# Altium PCB PCB1.PCBDOC
Units mm, origin at the board's own origin, x right, y up, seen from the top; angles counter-clockwise.
Board outline 152.4 x 101.6 mm, 2 copper layers (Top Layer, Bottom Layer); 16 components, 32 nets, 107 pads, 0 vias.
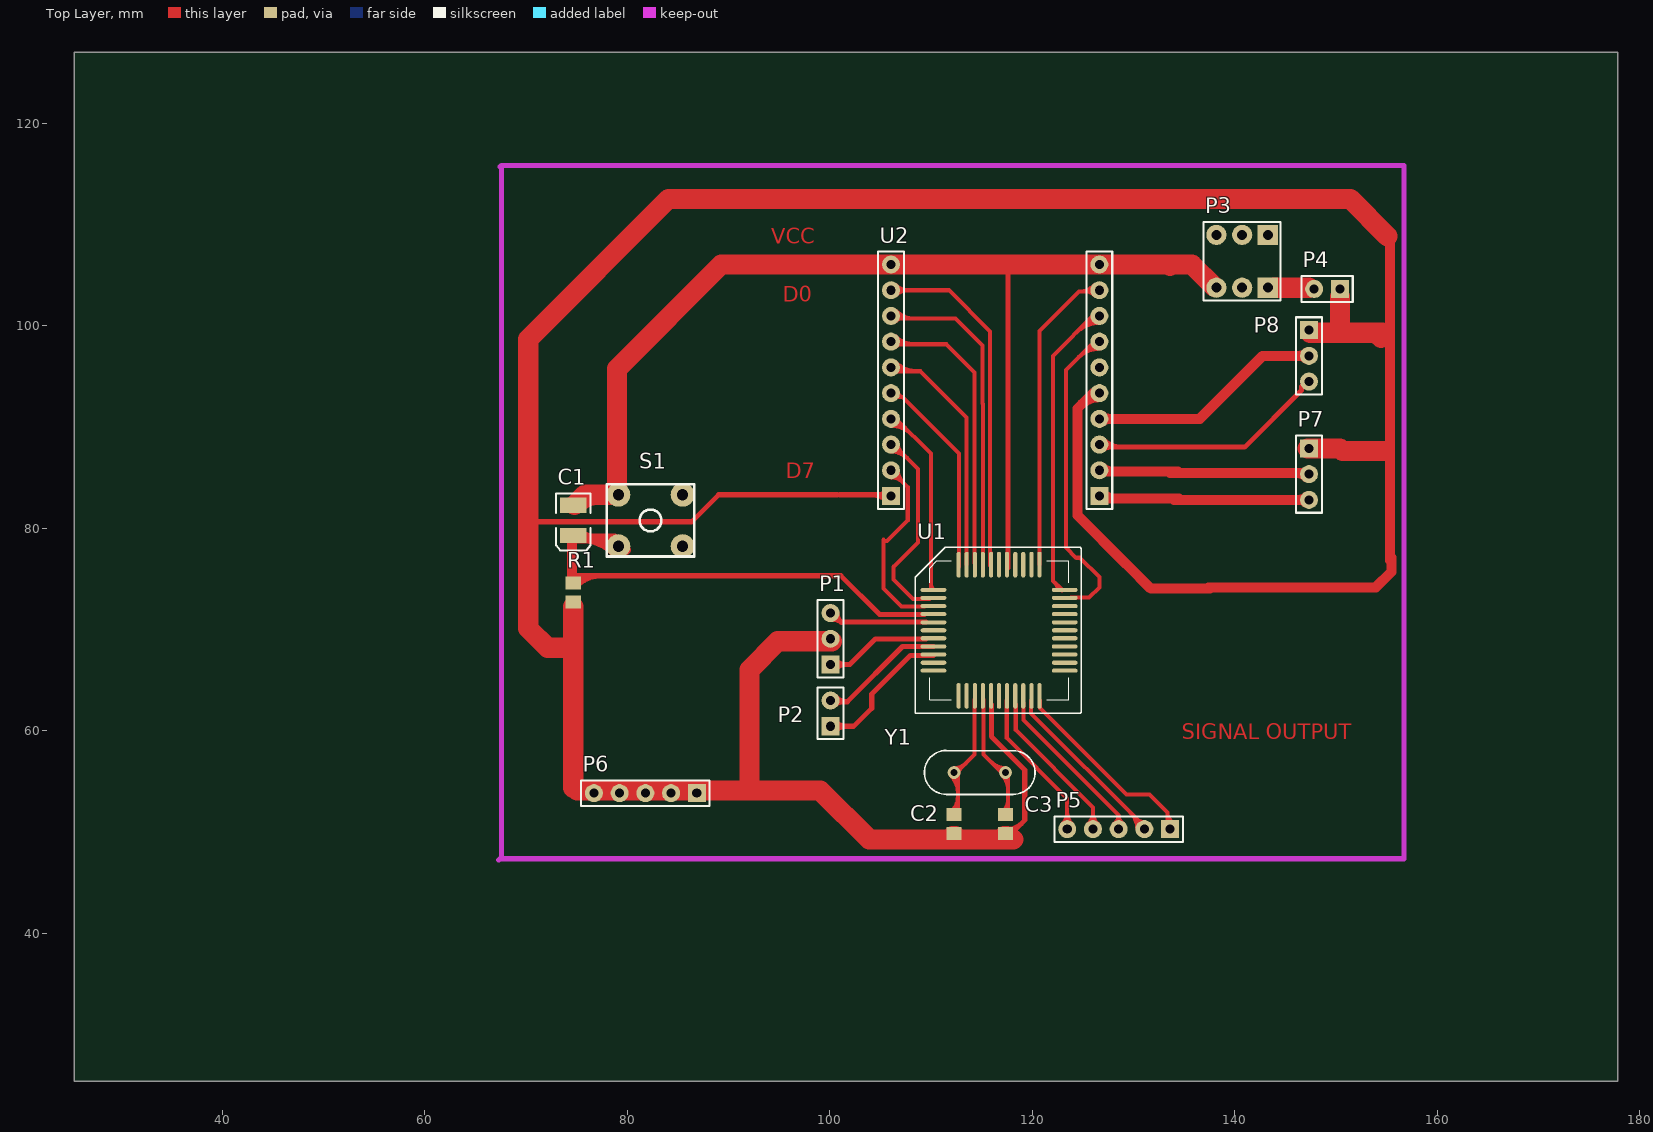
[diagram p0: Top Layer view]
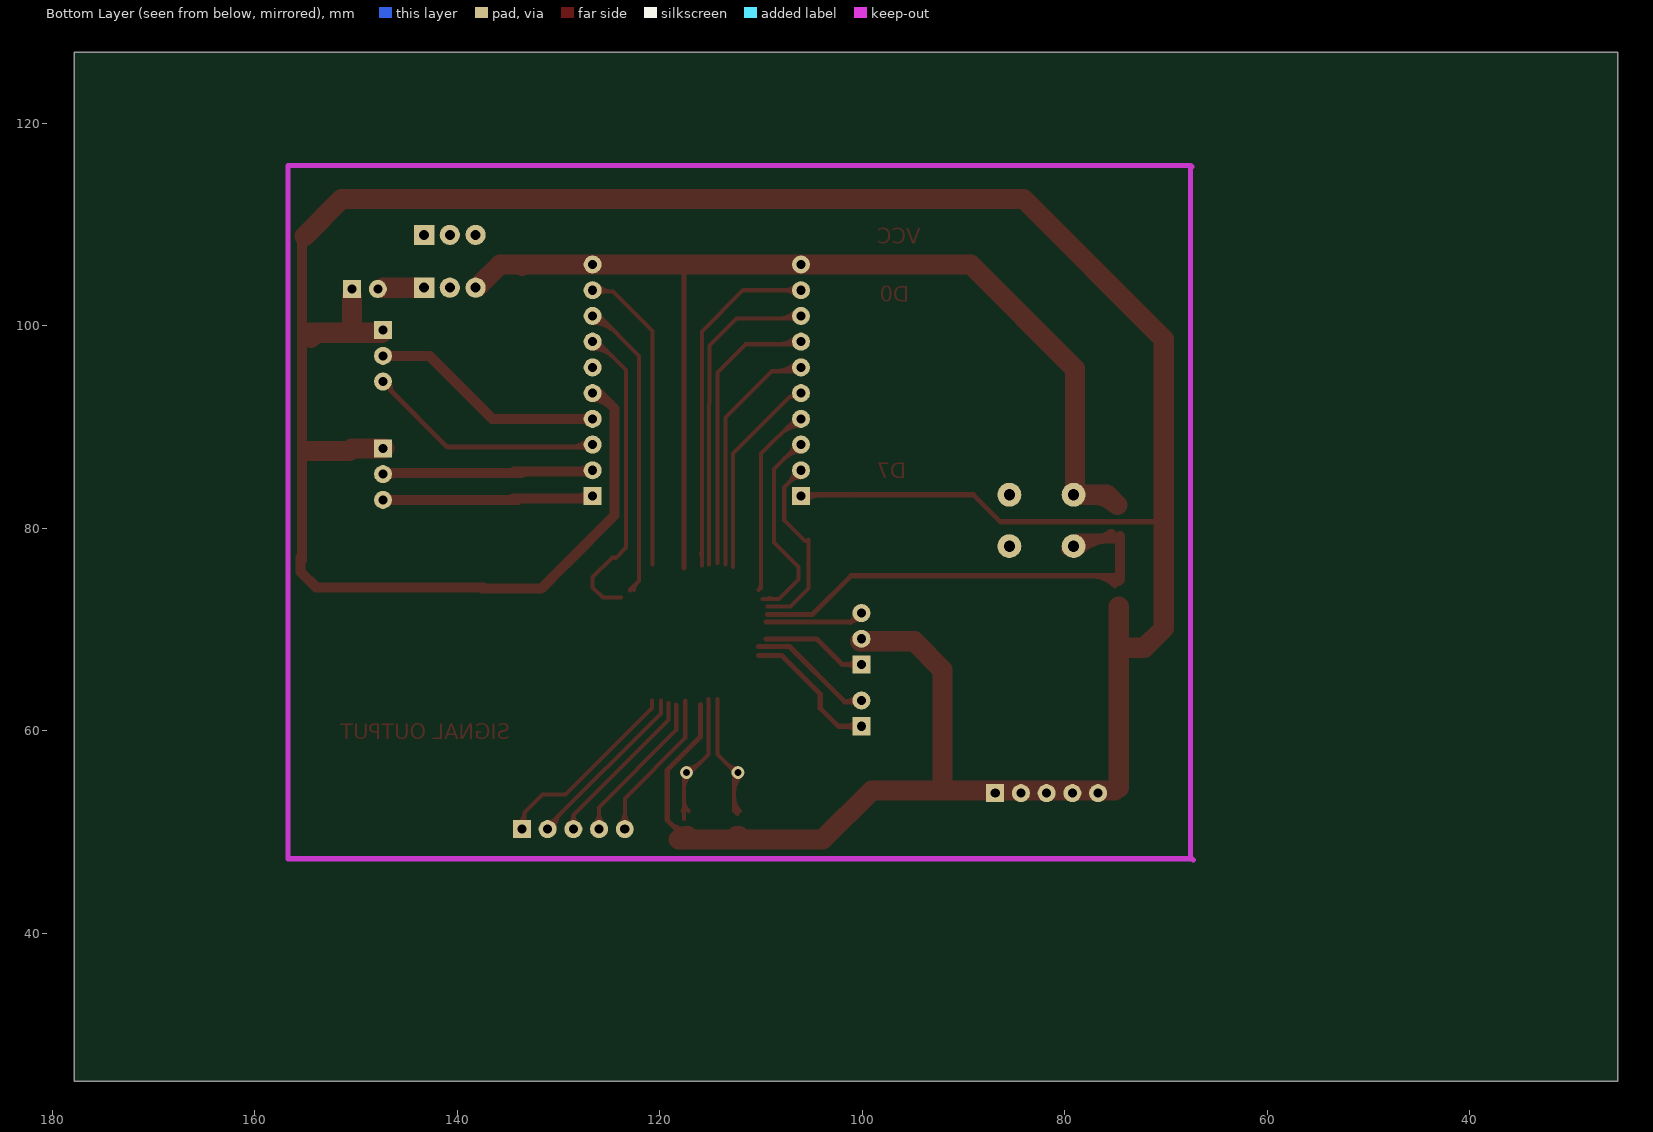
[diagram p1: Bottom Layer view, seen from below]

## Layer stack, top to bottom
Top Layer: signal copper 0.0356
Dielectric: dielectric 0.32, FR-4, Dk 4.8
Bottom Layer: signal copper 0.0356

## Board outline
25.4,25.4 177.8,25.4 177.8,127 25.4,127

## Design rules (kind name [scope] priority, off if disabled: settings)
Clearance [All] p1: gap=0.2
ComponentClearance [All] p1: gap=0.254 collisioncheckmode=3 verticalgap=0.254
PolygonConnect [All] p1: connectstyle=Relief reliefconductorwidth=0.254 reliefentries=4 polygonreliefangle="90 Angle"
RoutingVias [All] p1: holewidth=0.711 width=1.27 viastyle="Through Hole" minholewidth=0.711 minwidth=1.27 maxholewidth=0.711 maxwidth=1.27
SolderMaskExpansion [All] p1: expansion=0.102
TestPointUsage [All] p1: valid=0 allowmultiple=FALSE
Testpoint [All] p1: side=15 testpointundercomponent=TRUE minsize=1.016 maxsize=2.54 preferedsize=1.524 minholesize=0 maxholesize=1.016 preferedholesize=0.813 testpointgrid=0.025 style=1023 order=0123456789
Width [All] p1: maxlimit=3 minlimit=0.254 preferedwidth=0.254 minimp=50.000000 maximp=50.000000 favimp=50.000000
18 further rules are at their usual default settings.

## Components (designator, comment, footprint, x,y, rotation, side; value= is the part's Value field where it differs from the comment)
C1 "Cap Pol1" 3.5X2.8X1.9 74.676,80.772 r270 top
C2 "Cap" 2012[0805] 112.268,50.8 r90 top
C3 "Cap" 6-0805 117.348,50.8 r90 top
P1 "Header 3" HDR1X3 100.076,66.548 r90 top
P2 "Header 2" HDR1X2 100.076,60.452 r90 top
P3 "Header 3X2" KZ 143.764,108.204 r180 top
P4 "Header 2" HDR1X2 150.368,103.632 r180 top
P5 "Header 5" HDR1X5 133.604,50.292 r180 top
P6 "Header 5" HDR1X5 86.868,53.848 r180 top
P7 "Header 3" HDR1X3 147.32,87.884 r270 top
P8 "Header 3" HDR1X3 147.32,99.568 r270 top
R1 "Res2" 6-0805 74.676,73.66 r90 top
S1 "SW-PB" 按键 82.296,80.772 r90 top
U1 "STC11F02" LQLPF44 109.728,62.992 r0 top
U2 "AD9850" ADMK 104.648,81.788 r0 top
Y1 "XTAL" XTAL-200mil 112.268,55.88 r0 top

## Footprints (in the part's own frame and the unit in brackets; to place one, negate y for a bottom-side part, rotate by r counter-clockwise, add the part's x,y. Pads: shape width x height; smd on the part's side, far side on the other; paste and mask are expansions set on the pad)
3.5X2.8X1.9 [mm] "SM LED; 2 C-Bend Leads; Body 3.5 x 2.8 x 1.9 mm, inc leads (LxWxH typ)"
  rect 1.5x2.6 smd: 1(-1.5,0) 2(1.5,0)
  silkscreen extent -2.65,-1.7 2.95,1.7
6-0805 [mm] "Chip Resistor; Body 2.0 x 1.3 mm (LxW typ)"
  rect 1.3x1.5 smd: 1(-0.95,0) 2(0.95,0)
2012[0805] [mm] "Chip Resistor; Body 2.0 x 1.3 mm (LxW typ)"
  rect 1.3x1.5 smd: 1(-0.95,0) 2(0.95,0)
ADMK [mil]
  rect 70.06x70.06 hole 35.43: 1(55,55) 20(865,55)
  round 70.06 hole 35.43: 2(55,155) 3(55,255) 4(55,355) 5(55,455) 6(55,555) 7(55,655) 8(55,755) 9(55,855) 10(55,955) 11(865,955) 12(865,855) 13(865,755) 14(865,655) 15(865,555) 16(865,455) 17(865,355) 18(865,255) 19(865,155)
  Top Layer lines w10: 45,55 55,55 ; 55,45 55,55 ; 55,65 55,55 ; 65,55 60,55 55,55 ; 855,40 865,40 ; 865,30 865,40 ; 865,50 865,40 ; 895,40 865,40
  silkscreen extent 5,5 915,1005
HDR1X2 [mm] "Connector; Header; 2 Position"
  rect 1.779x1.779 hole 0.9: 1(0,0)
  round 1.779 hole 0.9: 2(2.54,0)
  silkscreen extent -1.27,-1.27 3.81,1.27
HDR1X3 [mm] "Connector; Header; 3 Position"
  rect 1.779x1.779 hole 0.9: 1(0,0)
  round 1.779 hole 0.9: 2(2.54,0) 3(5.08,0)
  silkscreen extent -1.27,-1.27 6.35,1.27
HDR1X5 [mm] "Connector; Header; 5 Position"
  rect 1.779x1.779 hole 0.9: 1(0,0)
  round 1.779 hole 0.9: 2(2.54,0) 3(5.08,0) 4(7.62,0) 5(10.16,0)
  silkscreen extent -1.27,-1.27 11.43,1.27
KZ [mm]
  rect 2x2 hole 1: 1(0.508,4.445) 4(0.508,-0.762)
  round 2 hole 1: 2(3.048,4.445) 3(5.588,4.445) 5(3.048,-0.762) 6(5.588,-0.762)
  silkscreen extent -0.76,-2.03 6.86,5.72
LQLPF44 [mil] "STC"
  oval 100x16 smd: 1(20,430) 2(20,399) 3(20,367) 4(20,336) 5(20,304) 6(20,273) 7(20,242) 8(20,210) 9(20,179) 10(20,147) 11(20,116) 23(530,116) 24(530,147) 25(530,179) 26(530,210) 27(530,242) 28(530,273) 29(530,304) 30(530,336) 31(530,367) 32(530,399) 33(530,430)
  oval 16x100 smd: 12(118,18) 13(149,18) 14(181,18) 15(212,18) 16(244,18) 17(275,18) 18(306,18) 19(338,18) 20(369,18) 21(401,18) 22(432,18) 34(432,528) 35(401,528) 36(369,528) 37(338,528) 38(306,528) 39(275,528) 40(244,528) 41(212,528) 42(181,528) 43(149,528) 44(118,528)
  silkscreen extent -50,-50 595,595
XTAL-200mil [mil]
  round 50 hole 28: 1(0,0) 2(200,0)
  silkscreen extent -115,-85 315,86
按键 [mm]
  round 2.358 hole 1.1: 1(-2.54,3.175) 1(-2.54,-3.175) 2(2.54,3.175) 2(2.54,-3.175)
  silkscreen extent -3.56,-4.32 3.56,4.32

## Part data
C1: "Polarized Capacitor (Radial)"
C2 C3: "Capacitor"
P1 P7 P8: "Header, 3-Pin"
P2 P4: "Header, 2-Pin"
P3: "Header, 3-Pin, Dual row"
P5 P6: "Header, 5-Pin"
R1: "Resistor"
S1: "Switch"
Y1: "Crystal Oscillator"

## Nets (pads, with @x,y where several pads share a name; then routed paths per layer and width w, separated by ;. In a path a pad name is that pad's centre, name@x,y a point inside that pad or via, vN(x,y) a via of type N, cw(c..) or ccw(c..) an arc to the next point about the centre after c; other vN are vias at no path point)
CLKOUT0: U1.10
CLKOUT1: U1.34 U2.12 | length 33.4
  Top Layer w0.4: U1.34 120.701,99.492 124.587,103.378 U2.12@125.857,103.378 ; 124.647,103.378 ccw(c124.647,105.477) U2.12@126.131,103.993 ; 125.261,103.378 cw(c125.261,102.147) U2.12@126.131,103.017 ; 125.613,103.378 ccw(c125.613,104.511) U2.12@126.414,103.71
DATA: U1.33 U2.13 | length 35.2
  Top Layer w0.4: 122.256,74.594 cw(c121.615,73.953) U1.33@122.519,73.884 ; U1.33@122.809,74.041 122.047,74.803 122.047,97.028 U2.13@126.111,101.092 ; U1.33@122.871,73.979 cw(c122.758,73.865) U1.33@122.918,73.853 ; 124.358,99.339 cw(c126.619,97.077) U2.13@126.619,100.275 ; 125.04,100.021 cw(c126.619,98.443) U2.13@126.619,100.675 ; 125.723,100.704 cw(c126.619,99.809) U2.13@126.619,101.075
FU_UD: U1.32 U2.14 | length 33.5
  Top Layer w0.4: U1.32@123.825,73.152 125.603,73.152 126.619,74.168 126.619,75.184 124.714,77.089 124.333,77.089 123.317,78.105 123.317,95.631 125.73,98.044 ; 124.574,96.888 cw(c126.619,94.844) U2.14@126.619,97.735 ; 125.257,97.571 cw(c126.619,96.209) U2.14@126.619,98.135
GND: C2.1 C3.1 P1.2 P4.1 P6.1 P6.2 P6.3 P6.4 P6.5 P7.1 P8.1 R1.1 U1.16 U2.1 U2.16 | length 369.7
  Top Layer w0.5: 70.612,81.026 70.993,80.645 86.36,80.645 89.027,83.312 100.711,83.312 ; 100.965,83.312 105.283,83.312 U2.1@105.41,83.185 ; 104.194,83.312 cw(c104.194,81.334) U2.1@105.593,82.733 ; 104.807,83.312 ccw(c104.807,84.423) U2.1@105.593,83.637 ; U1.16@115.951,62.611 115.951,59.436 119.253,56.134 119.253,51.181 117.475,49.403 C3.1@117.348,49.403 ; C3.1@117.448,49.75 ccw(c117.448,50.653) C3.1@118.086,50.014 ; C3.1@117.448,50.25 ccw(c117.448,52.36) 118.94,50.868
  Top Layer w1: 124.87,92.231 cw(c126.619,90.481) U2.16@126.619,92.955 ; U2.16@125.984,93.345 124.46,91.821 124.46,81.28 129.286,76.454 ; 129.413,76.327 131.699,74.041 137.541,74.041 ; 137.414,74.168 153.924,74.168 155.448,75.692 155.448,77.089 ; 155.321,76.835 155.321,108.712 155.448,108.839
  Top Layer w2: 74.295,68.199 72.136,68.199 70.231,70.104 70.231,98.679 84.074,112.522 151.384,112.522 155.067,108.839 ; 74.676,54.356 R1.1@74.676,72.263 ; 75.057,54.102 99.06,54.102 103.886,49.276 118.11,49.276 ; 92.075,54.737 92.075,66.04 94.869,68.834 P1.2@100.203,68.834 ; C2.1@111.627,49.276 ccw(c111.627,50.391) C2.1@112.415,49.603 ; C2.1@112.121,49.603 ccw(c112.909,50.391) C2.1@112.909,49.276 ; C3.1@116.707,49.276 ccw(c116.707,50.391) C3.1@117.495,49.603 ; C3.1@117.201,49.603 ccw(c117.989,50.391) C3.1@117.989,49.276 ; P7.1@147.193,87.884 150.368,87.884 ; P8.1@147.447,99.314 154.559,99.314 ; 150.114,99.441 150.368,99.695 P4.1@150.368,102.87 ; 150.622,87.63 154.813,87.63 ; 154.178,99.06 154.432,98.806
INT0: P2.2 U1.8 | length 14.5
  Top Layer w0.5: P2.2@100.203,62.865 101.727,62.865 ; P2.2@100.528,62.54 cw(c101.314,61.754) 101.314,62.865 ; P2.2@100.565,63.405 ccw(c101.727,64.386) 101.727,62.865 ; U1.8 107.188,68.326 101.727,62.865
INT1: P2.1 U1.9 | length 15.4
  Top Layer w0.5: P2.1@100.528,60 cw(c101.62,58.908) 101.62,60.452 cw(c101.62,61.996) P2.1@100.528,60.904 ; P2.1@100.965,60.452 102.362,60.452 104.14,62.23 104.14,63.627 107.95,67.437 U1.9@110.236,67.437
NetC2_2: C2.2 U1.14 Y1.1 | length 19.2
  Top Layer w0.4: Y1.1@111.96,55.572 cw(c110.298,53.91) 112.649,53.91 ; C2.2@112.05,52.068 ccw(c110.603,53.515) 112.649,53.515 ; Y1.1@112.243,55.855 cw(c111.264,54.876) 112.649,54.876 ; Y1.1@112.268,55.626 114.3,57.658 U1.14@114.3,63.119 ; Y1.1@112.268,56.315 ccw(c112.268,57.978) 113.444,56.802 ; C2.2@112.333,51.785 ccw(c111.569,52.549) 112.649,52.549 ; C2.2@112.649,52.07 Y1.1@112.649,55.88 ; Y1.1@112.703,55.88 cw(c113.14,55.88) 112.831,56.189
NetC3_2: C3.2 U1.15 Y1.2 | length 19.3
  Top Layer w0.4: U1.15@115.111,62.38 cw(c114.921,62.191) 115.189,62.191 ; U1.15@115.189,63.119 115.189,57.658 Y1.2@117.221,55.626 ; 115.955,56.892 ccw(c117.348,58.285) Y1.2@117.348,56.315 ; 116.638,56.209 ccw(c117.348,56.919) Y1.2@117.348,55.915 ; Y1.2@117.04,55.572 cw(c115.685,54.217) 117.602,54.217 ; C3.2@117.13,52.068 ccw(c115.99,53.208) 117.602,53.208 ; Y1.2@117.323,55.855 cw(c116.65,55.182) 117.602,55.182 ; C3.2@117.602,51.308 Y1.2@117.602,55.753 ; 117.602,52.465 ccw(c118.163,52.465) C3.2@117.766,52.068
P1.0: U1.40 U2.9 | length 37.3
  Top Layer w0.4: U2.9@106.172,103.505 111.76,103.505 115.824,99.441 U1.40@115.824,76.327 ; U2.9@106.533,103.017 cw(c107.71,101.84) 107.71,103.505 cw(c107.71,105.17) U2.9@106.533,103.993 ; 115.824,77.723 ccw(c116.179,77.723) U1.40@115.928,77.472
P1.1: U1.41 U2.8 | length 35.3
  Top Layer w0.4: U2.8@106.25,101.17 ccw(c107.358,102.278) 107.358,100.711 ; U2.8@106.299,100.711 112.395,100.711 115.062,98.044 115.062,92.329 ; U2.8@106.533,100.477 cw(c107.097,99.913) 107.097,100.711 ; U2.8@106.533,101.453 ccw(c108.323,103.243) 108.323,100.711 ; U1.41 115.113,92.278
P1.2: U1.42 U2.7 | length 31.3
  Top Layer w0.4: U2.7@106.25,98.63 ccw(c107.358,99.738) 107.358,98.171 ; U2.7@106.533,97.937 cw(c107.097,97.373) 107.097,98.171 ; U2.7@106.533,98.913 ccw(c108.323,100.703) 108.323,98.171 ; U2.7@106.68,98.171 111.506,98.171 114.3,95.377 114.3,90.805 ; U1.42@114.3,76.581 114.3,90.678
P1.3: U1.43 U2.6 | length 27.3
  Top Layer w0.4: U2.6@106.25,96.09 ccw(c107.664,97.504) 107.664,95.504 ; U2.6@106.533,96.373 ccw(c108.63,98.47) 108.63,95.504 ; U2.6@106.553,95.504 108.966,95.504 113.513,90.957 U1.43
P1.4: U1.44 U2.5 | length 20.1
  Top Layer w0.4: U2.5@106.733,93.39 ccw(c107.188,93.42) 107.188,92.964 ; U2.5@106.807,92.964 107.188,92.964 ; U1.44@112.776,76.2 112.776,87.376 107.188,92.964
P1.5: U1.1 U2.4 | length 22.7
  Top Layer w0.4: U2.4@106.045,90.115 cw(c106.045,87.224) 108.09,89.268 ; U2.4@106.045,90.515 cw(c106.045,88.589) 107.407,89.951 ; U2.4@106.553,90.805 109.982,87.376 U1.1@109.982,74.041 ; 109.982,74.535 ccw(c110.857,74.535) U1.1@110.238,73.916
P1.6: U1.2 U2.3 | length 22.9
  Top Layer w0.4: U2.3@106.045,87.575 cw(c106.045,85.297) 107.656,86.908 ; U2.3@106.045,87.975 cw(c106.045,86.663) 106.973,87.591 ; 106.299,74.93 108.204,73.025 U1.2@109.855,73.025 ; 106.299,75.057 106.299,76.2 108.712,78.613 108.712,85.852 U2.3@106.68,87.884 ; U2.3@106.735,88.265 ccw(c107.787,88.265) 107.043,87.521 ; 108.916,73.025 ccw(c108.916,73.38) U1.2@109.167,73.129
P1.7: U1.3 U2.2 | length 20.6
  Top Layer w0.4: 105.283,78.74 105.664,78.74 107.696,80.772 107.696,84.074 U2.2@106.426,85.344 ; 105.283,78.867 105.283,74.041 107.061,72.263 U1.3@109.347,72.263 ; U2.2@106.045,85.035 cw(c106.045,83.37) 107.222,84.548 cw(c108.4,85.725) U2.2@106.735,85.725
P2.0: P5.5 U1.18 | length 17.9
  Top Layer w0.4: U1.18@117.475,62.992 117.475,59.309 123.444,53.34 P5.5@123.444,50.165 ; P5.5@122.956,50.78 ccw(c121.779,51.957) 123.444,51.957 ccw(c125.109,51.957) P5.5@123.932,50.78
P2.1: P5.4 U1.19 | length 17.7
  Top Layer w0.4: U1.19@118.364,62.611 118.364,60.071 125.984,52.451 P5.4@125.984,50.673 ; P5.4@125.496,50.78 ccw(c124.319,51.957) 125.984,51.957 ccw(c127.649,51.957) P5.4@126.472,50.78
P2.2: P5.3 U1.20 | length 18.2
  Top Layer w0.4: U1.20@119.126,62.738 119.126,61.087 128.524,51.689 ; P5.3@128.105,50.84 ccw(c127.454,51.689) 128.524,51.689 ; P5.3@128.524,50.419 128.524,51.689 ; P5.3@128.943,50.84 cw(c129.594,51.689) 128.524,51.689
P2.3: P5.2 U1.21 | length 20.8
  Top Layer w0.4: U1.21@119.888,62.992 119.888,61.722 130.683,50.927 P5.2@130.683,50.292 ; 129.707,51.903 cw(c128.096,50.292) P5.2@130.374,50.292 ; 130.32,51.29 ccw(c131.064,52.034) P5.2@131.064,50.982 ; 130.39,51.22 cw(c129.462,50.292) P5.2@130.774,50.292
P2.4: P5.1 U1.22 | length 21.5
  Top Layer w0.4: U1.22@120.777,62.992 120.777,62.23 129.286,53.721 131.572,53.721 133.35,51.943 ; P5.1@133.116,50.78 ccw(c132.552,51.344) 133.35,51.344 ; P5.1@133.35,50.8 133.35,51.943 ; 133.35,51.243 ccw(c134.164,51.243) P5.1@133.751,50.542 ; P5.1@133.954,50.886 cw(c134.576,51.943) 133.35,51.943
QOUT1: P8.2 U2.17 | length 26.5
  Top Layer w1: U2.17@126.492,90.805 136.525,90.805 142.748,97.028 P8.2@147.447,97.028 ; U2.17@126.895,90.529 cw(c127.56,89.864) 127.56,90.805 cw(c127.56,91.746) U2.17@126.895,91.081 ; P8.2@147.044,96.752 ccw(c146.379,96.087) 146.379,97.028 ccw(c146.379,97.969) P8.2@147.044,97.304
QOUT2: P8.3 U2.18 | length 26.6
  Top Layer w0.5: U2.18@126.718,88.364 ccw(c127.569,89.215) 127.569,88.011 ; U2.18@127,87.884 127.127,88.011 140.97,88.011 146.558,93.599 146.558,93.98 146.685,94.107 P8.3@147.447,94.107 ; U2.18@127.071,87.813 cw(c127.55,87.334) 127.55,88.011 ; U2.18@127.071,88.717 ccw(c128.777,90.423) 128.777,88.011
RESET: U2.15
RST: C1.2 R1.2 S1.1@79.121,78.232 U1.4 | length 58.3
  Top Layer w0.5: R1.2@74.352,75.034 cw(c75.02,74.366) 75.02,75.311 ; R1.2@74.549,75.184 74.676,75.311 101.092,75.311 104.902,71.501 U1.4@109.347,71.501 ; R1.2@74.705,74.681 cw(c76.227,73.159) 76.227,75.311 ; R1.2@75.059,74.327 cw(c77.434,71.952) 77.434,75.311
  Top Layer w1: 74.549,78.362 cw(c75.586,78.362) C1.2@74.853,79.095 ; C1.2@74.549,79.248 74.549,74.93 R1.2@74.676,74.803 ; C1.2@74.803,78.994 78.74,78.994 S1.1@79.883,77.851 ; C1.2@75.403,79.449 ccw(c76.501,80.547) 76.501,78.994 ; C1.2@75.642,78.994 cw(c75.642,74.753) S1.1@78.641,77.752 ; 78.056,78.994 cw(c78.056,77.167) S1.1@79.348,78.459
RXD: P1.3 U1.5 | length 11.7
  Top Layer w0.5: P1.3@100.174,70.996 cw(c100.349,69.869) 101.155,70.676 ; P1.3@100.203,71.628 101.092,70.739 U1.5@109.474,70.739 ; P1.3@100.716,71.628 ccw(c101.953,71.628) 101.078,70.753
TXD: P1.1 U1.7 | length 12.9
  Top Layer w0.5: P1.1 101.981,66.548 104.521,69.088 U1.7@109.474,69.088 ; P1.1@100.528,66.096 cw(c101.62,65.004) 101.62,66.548 cw(c101.62,68.092) P1.1@100.528,67
VCC: C1.1 P3.3 S1.2@79.121,83.312 U1.38 U2.10 U2.11 | length 112.5
  Top Layer w0.5: U1.38@117.602,76.073 117.602,105.537
  Top Layer w2: C1.1@74.803,82.296 75.819,83.312 S1.2@79.121,83.312 ; C1.1@75.049,82.449 cw(c77.133,80.365) 77.133,83.312 ; S1.2@78.994,83.82 78.994,95.758 89.281,106.045 133.477,106.045 133.604,105.918 ; 133.731,106.045 135.763,106.045 P3.3@137.922,103.886
VDD: P3.1 P4.2 | length 3.4
  Top Layer w2: P3.1@143.891,103.759 P4.2@147.32,103.759
ZOUT1: P7.2 U2.19 | length 23.3
  Top Layer w1: U2.19@126.873,85.598 134.366,85.598 ; U2.19@126.895,86.001 ccw(c127.866,86.972) 127.866,85.598 ; 133.604,85.471 146.939,85.471 P7.2@147.193,85.217 ; 146.073,85.471 cw(c146.073,84.097) P7.2@147.044,85.068
ZOUT2: P7.3 U2.20 | length 24
  Top Layer w0.254: P7.3@147.574,82.804 P7.3@147.701,82.677
  Top Layer w1: U2.20@126.746,83.312 127.127,82.931 134.493,82.931 ; U2.20@126.895,83.461 ccw(c128.173,84.739) 128.173,82.931 ; 133.985,82.804 146.812,82.804 P7.3@146.939,82.677 ; P7.3@147.044,82.528 ccw(c146.379,81.863) 146.379,82.804 ccw(c146.379,83.745) P7.3@147.044,83.08
pads on no net: P3.2 P3.4 P3.5 P3.6 S1.1@85.471,78.232 S1.2@85.471,83.312 U1.6 U1.11 U1.12 U1.13 U1.17 U1.23 U1.24 U1.25 U1.26 U1.27 U1.28 U1.29 U1.30 U1.31 U1.35 U1.36 U1.37 U1.39

## Keep-outs
Keep-Out Layer:
  lines w0.5: 67.31,47.244 67.564,47.498 67.564,115.824 ; 67.437,47.371 156.718,47.371 156.718,115.824 67.564,115.824 ; 67.437,115.697 67.564,115.824

## Other copper
Top Layer:
  text "VCC" at 94.234,108.077 h1.52
  text "D0" at 95.377,102.362 h1.52
  text "D7" at 95.631,84.963 h1.52
  text "SIGNAL OUTPUT" at 134.747,59.182 h1.52